# Altium PCB InstallGuide-V2.PcbDoc
Units mm, origin at the board's own origin, x right, y up, seen from the top; angles counter-clockwise.
Board outline 152.4 x 101.6 mm, 2 copper layers (Top Layer, Bottom Layer); 21 components, 11 nets, 77 pads, 78 vias.
Unrouted connection lines stored in the file: 1.
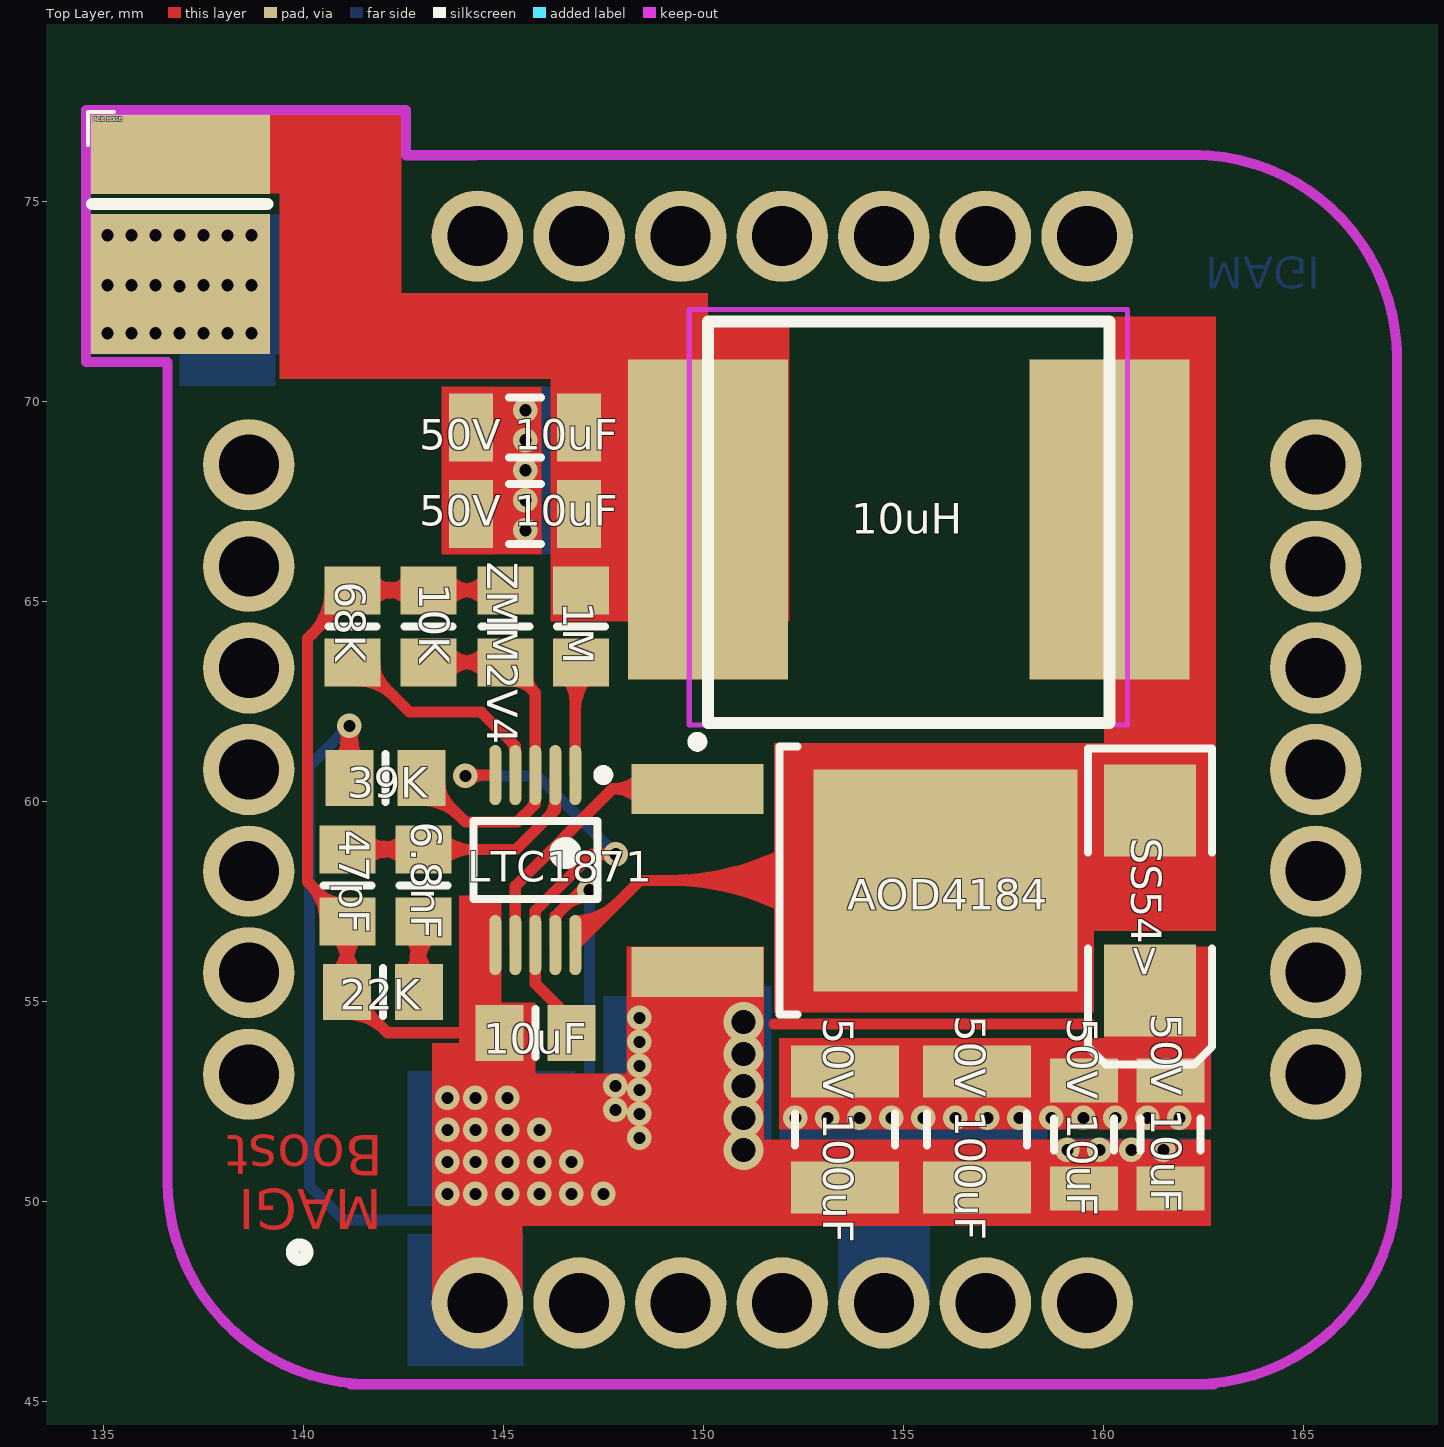
[diagram p0: Top Layer view]
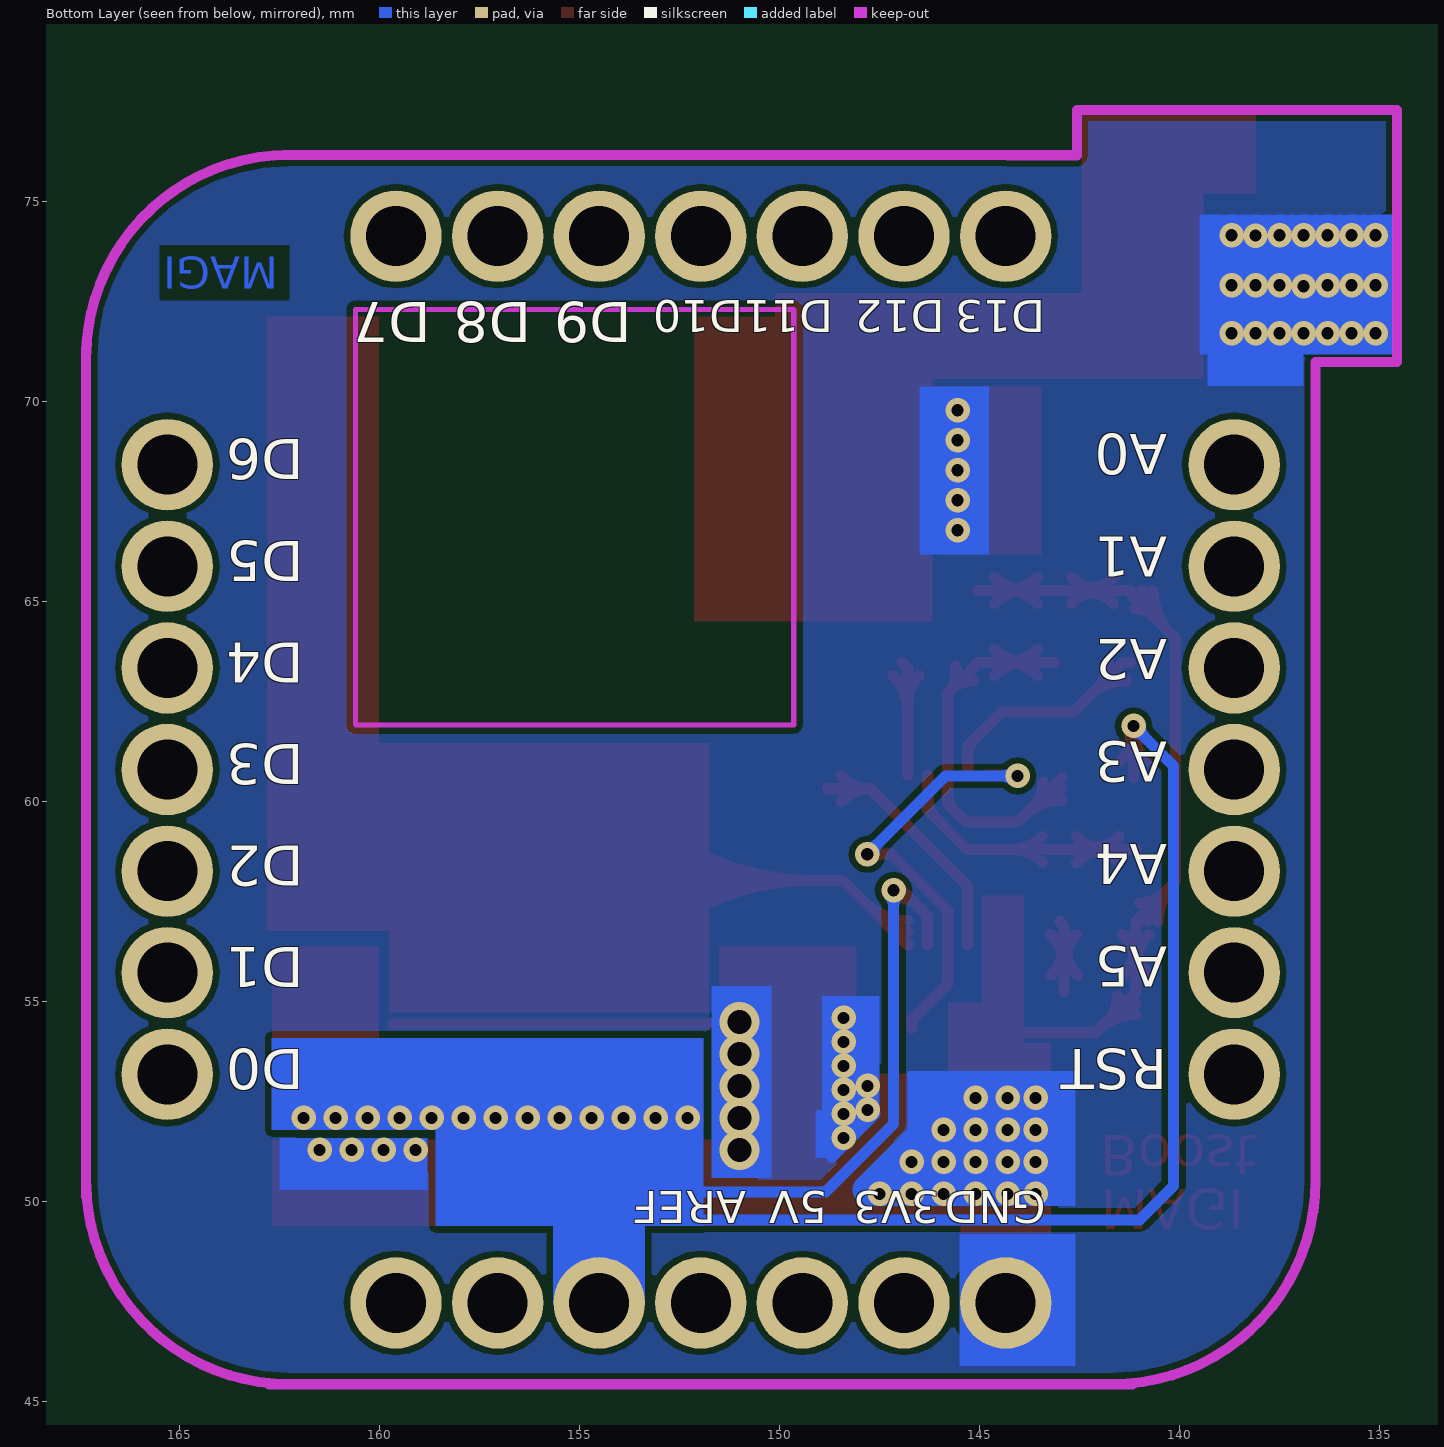
[diagram p1: Bottom Layer view, seen from below]

## Layer stack, top to bottom
Top Solder: solder mask 0.0102, Solder Resist, Dk 3.5
Top Layer: signal copper 0.0356
Dielectric 1: dielectric 0.32, FR-4, Dk 4.8
Bottom Layer: signal copper 0.0356
Bottom Solder: solder mask 0.0102, Solder Resist, Dk 3.5

## Board outline
25.4,25.4 177.8,25.4 177.8,127 25.4,127

## Design rules (kind name [scope] priority, off if disabled: settings)
Clearance [All] p1: gap=0.152
PolygonConnect [All] p1: connectstyle=Relief reliefconductorwidth=0.254 reliefentries=4 polygonreliefangle="90 Angle" airgapwidth=0.254
RoutingVias [All] p1: holewidth=7.112 width=12.7 viastyle="Through Hole" minholewidth=0.305 minwidth=0.61 maxholewidth=0.711 maxwidth=1.27
SolderMaskExpansion [All] p1: expansion=0.102
Width [All] p1: maxlimit=2.54 minlimit=0.152 preferedwidth=0.254
29 further rules are at their usual default settings.

## Components (designator, comment, footprint, x,y, rotation, side; value= is the part's Value field where it differs from the comment)
C1 "CAP_1" C1206 145.542,67.201 r180 top
C2 "CAP_1" C1206 145.542,69.36 r0 top
C3 "CAP_1" C1210_N 156.845,51.816 r90 top
C4 "CAP_1" C1210_N 153.543,51.816 r90 top
C5 "CAP_1" C1206 161.671,51.689 r90 top
C6 "CAP_1" C1206 159.512,51.689 r90 top
C7 "1uf" 6-0805_N 141.097,57.912 r90 top
C8 "CAP_1" 6-0805_n 145.796,54.229 r0 top
C9 "1uf" 6-0805_N 141.986,55.245 r0 top
D1 "DIODE_1" SMB 161.163,57.531 r270 top
D2 "LED_0805" 6-0805_n 145.05,64.389 r270 top
J1 "MAGIsBoard" MAGIsBoard 151.97,60.81 r180 top
J2 "CON2" T-Mini 136.92,74.57 r0 top
L1 "INDUCTOR" 10*10 155.067,67.056 r180 top
R1 "0805" 6-0805_N 146.939,64.389 r270 top
R2 "0805" 6-0805_N 143.002,57.912 r90 top
R3 "0805" 6-0805_N 143.129,64.389 r90 top
R4 "0805" 6-0805_N 141.224,64.389 r90 top
R5 "0805" 6-0805_N 142.05,60.6 r180 top
U1 "LTC1871" LTC1871 145.796,58.547 r270 top
U10 "NMOS" AOD4184 153.797,58.039 r0 top

## Footprints (in the part's own frame and the unit in brackets; to place one, negate y for a bottom-side part, rotate by r counter-clockwise, add the part's x,y. Pads: shape width x height; smd on the part's side, far side on the other; paste and mask are expansions set on the pad)
6-0805_N [mm] "Chip Resistor, Body 2.0x1.2mm, IPC Medium Density"
  rect 1.2x1.4 smd: 1(-0.9,0) 2(0.9,0)
  silkscreen extent 0,-0.6 0,0.6, body extent -1.07,-0.7 1.07,0.7, height 0.7
6-0805_n [mm] "Chip Resistor, Body 2.0x1.2mm, IPC Medium Density"
  rect 1.2x1.4 smd: 1(-0.9,0) 2(0.9,0)
  silkscreen extent 0,-0.6 0,0.6, body extent -1.07,-0.7 1.07,0.7, height 0.7
10*10 [mm]
  rect 4x8 smd: 1(-5.08,0) 2(4.953,0)
  silkscreen extent -5.08,-4.95 4.95,5.08
AOD4184 [mm] "D-PAK, 3-Pads, Body 6.21x6.73mm (max), IPC Medium Density"
  rect 3.3x1.25 smd: 1(-3.95,2.29) 3(-3.95,-2.29)
  rect 6.6x5.55 smd: 4(2.25,0)
  silkscreen extent -4.07,-3.35 -1.45,3.59, body extent -2.3,-3.37 3.92,3.37, height 2.39
C1206 [mm] "Chip Capacitor, Body 3.2x1.6mm, IPC High Density"
  rect 1.1x1.7 smd: 1(-1.35,0) 2(1.35,0)
  silkscreen extent -0.4,-0.75 0.4,0.75, body extent -1.7,-0.9 1.7,0.9, height 1.3
C1210_N [mm] "Chip Capacitor, Body 3.2x2.5mm, IPC Medium Density"
  rect 1.3x2.7 smd: 1(-1.45,0) 2(1.45,0)
  silkscreen extent -0.4,-1.25 0.4,1.25, body extent -1.7,-1.35 1.7,1.35, height 1.5
LTC1871 [mm]
  oval 1.5x0.3 smd: 1(-2.125,1) 2(-2.125,0.5) 3(-2.125,0) 4(-2.125,-0.5) 5(-2.125,-1) 6(2.125,-1) 7(2.125,-0.5) 8(2.125,0) 9(2.125,0.5) 10(2.125,1)
  silkscreen extent -2.25,-1.55 0.97,1.83, body extent -1.55,-1.55 1.55,1.55, height 1.1
MAGIsBoard [mil]
  round 90 hole 59.06: 1(300,525) 2(200,525) 3(100,525) 4(0,525) 5(-100,525) 6(-200,525) 7(-300,525) 8(-525,300) 9(-525,200) 10(-525,100) 11(-525,0) 12(-525,-100) 13(-525,-200) 14(-525,-300) 15(-300,-525) 16(-200,-525) 17(-100,-525) 18(0,-525) 19(100,-525) 20(200,-525) 21(300,-525) 22(525,-300) 23(525,-200) 24(525,-100) 25(525,0) 26(525,100) 27(525,200) 28(525,300)
  Keep-Out Layer lines w10: 605,405 ccw(c405,405) 405,605 ; 425,605 -425,605 ; 370.2,-605 -410,-605 ; -405,605 ccw(c-405,405) -605,405 ; -405,-605 cw(c-405,-405) -605,-405 ; -605,420 -605,290 -605,-415
  silkscreen extent 468,468 482,482
SMB [mm] "DO-214-AA/SMB; 2 C-Bend Leads; Body 5.3 x 3.6 mm, inc. leads (LxW)"
  rect 2.3x2.3 smd: 1(-2.25,0) 2(2.25,0)
  silkscreen extent -3.8,-1.55 4.1,1.55
T-Mini [mm]
  rect 4.5x2 smd: 1(0,1.625)
  rect 4.5x3.5 smd: 2(0,-1.625)
  silkscreen extent -2.3,0.38 2.18,2.68

## Part data
C1 C2 C3 C4 C5 C6 C8: "Capacitor"
C7 C9: library part CAP_1, "Capacitor"
D1: "Diode"
D2: "LED"
J2: "Connector"
R1 R2 R3 R4 R5: library part RES1_1
U10: "TO252"

## Via types
v1: diameter 0.61, hole 0.305, Top Layer to Bottom Layer, 73 vias
v2: diameter 1, hole 0.6, Top Layer to Bottom Layer, 5 vias

## Nets (pads, with @x,y where several pads share a name; then routed paths per layer and width w, separated by ;. In a path a pad name is that pad's centre, name@x,y a point inside that pad or via, vN(x,y) a via of type N, cw(c..) or ccw(c..) an arc to the next point about the centre after c; other vN are vias at no path point)
GND: C1.2 C2.1 C3.1 C4.1 C5.1 C6.1 C7.1 C8.1 C9.1 D2.1 J1.1 J2.2 R3.2 R4.2 U1.6 U10.3 | length 56.2
  Top Layer w0.279: 140.141,57.968 cw(c139.184,57.012) C7.1@140.537,57.012 ; 140.206,64.184 ccw(c139.101,65.289) R4.2@140.664,65.289 ; 140.382,57.727 ccw(c140.997,58.342) C7.1@140.997,57.472 ; C7.1@140.617,57.492 cw(c140.138,57.012) C7.1@140.816,57.012 ; 140.657,64.635 cw(c141.124,64.169) R4.2@141.124,64.829 ; 140.683,64.661 ccw(c140.055,65.289) R4.2@140.943,65.289 ; C9.1@140.761,55.67 ccw(c139.975,56.456) 141.086,56.456 ccw(c142.197,56.456) C9.1@141.411,55.67 ; C7.1@140.772,56.687 cw(c140.012,55.927) C9.1@141.086,55.927 ; C7.1@140.877,56.568 cw(c140.817,56.345) 141.04,56.285 ; C7.1@141.075,56.415 cw(c141.39,56.33) C7.1@141.227,56.613 ; C9.1@141.086,54.685 cw(c141.086,53.332) 142.042,54.289 ; C9.1@141.086,54.964 cw(c141.086,54.286) C9.1@141.566,54.765 ; C9.1@141.086,55.874 cw(c142.235,55.874) C7.1@141.422,56.687 ; C9.1@141.546,55.145 ccw(c142.416,55.145) 141.801,54.53 ; R4.2@141.649,64.964 cw(c142.435,64.178) 142.435,65.289 cw(c142.435,66.4) R4.2@141.649,65.614 ; 142.137,65.209 cw(c142.261,64.744) R3.2@142.654,65.023 ; 142.137,65.369 ccw(c142.261,65.834) R3.2@142.654,65.555 ; 142.274,65.246 ccw(c142.122,65.812) R3.2@142.63,65.519 ; 142.274,65.332 cw(c142.122,64.766) R3.2@142.63,65.059 ; R3.2@142.704,64.964 ccw(c141.918,64.178) 141.918,65.289 ccw(c141.918,66.4) R3.2@142.704,65.614 ; R3.2@143.554,64.964 cw(c144.34,64.178) 144.34,65.289 cw(c144.34,66.4) R3.2@143.554,65.614 ; C8.1@144.571,53.904 ccw(c143.785,53.118) 143.785,54.229 ccw(c143.785,55.34) C8.1@144.571,54.554 ; D2.1@144.625,64.964 ccw(c143.839,64.178) 143.839,65.289 ccw(c143.839,66.4) D2.1@144.625,65.614 ; C8.1 142.102,54.229 C9.1 141.086,57.001 C7.1 140.105,58.004 140.105,64.083 141.224,65.202 R4.2 R3.2 D2.1 ; U10.3 U10.3@150.34,55.749 ; 151.765,54.445 159.67,54.445
  Bottom Layer w0.254: v1@147.6,52.2 148.7,51.1 cw(c149.042,51.442) v1@148.573,51.557 ; v1@147.724,52.3 ccw(c148.264,52.3) 147.882,51.918 ; v1@147.724,52.303 ccw(c148.115,52.289) 147.919,51.95 ; v1@147.755,52.045 ccw(c148.4,52.69) v1@148.4,51.778 ; v1@147.978,52.294 ccw(c148.594,52.273) v1@148.286,51.739 ; v1@147.978,52.3 ccw(c149.131,52.3) v1@148.316,51.484
  Bottom Layer w0.762: 146.573,51.527 147.8,50.3
  other v1: 143.6,50.2 144.3,50.2 145.1,50.2 145.9,50.2 146.7,50.2 147.5,50.2 143.6,51 144.3,51 145.1,51 145.9,51 146.7,51 159.1,51.3 159.9,51.3 160.7,51.3 161.5,51.3 148.4,51.6 143.6,51.8 144.3,51.8 145.1,51.8 145.9,51.8 148.4,52.2 147.8,52.3 143.6,52.6 144.3,52.6 145.1,52.6 148.4,52.8 147.8,52.9 148.4,53.4 148.4,54 148.4,54.6 145.55,66.79 145.55,67.54 145.55,68.29 145.55,69.04 145.55,69.79 135.1,71.715 135.7,71.715 136.3,71.715 136.9,71.715 137.5,71.715 138.1,71.715 138.7,71.715 136.9,72.89 135.1,72.915 135.7,72.915 136.3,72.915 137.5,72.915 138.1,72.915 138.7,72.915 135.1,74.165 135.7,74.165 136.3,74.165 136.9,74.165 137.5,74.165 138.102,74.159 138.7,74.165
  other v2: 151,51.3 151,52.1 151,52.9 151,53.7 151,54.5
NetC7_2: C7.2 R2.2 U1.2 | length 14.4
  Top Layer w0.279: C7.2 R2.2 145.312,58.812 146.296,59.796 U1.2 ; C7.2@141.522,58.487 cw(c142.308,57.701) 142.308,58.812 cw(c142.308,59.923) C7.2@141.522,59.137 ; 142.01,58.732 cw(c142.134,58.267) R2.2@142.527,58.546 ; 142.01,58.892 ccw(c142.134,59.357) R2.2@142.527,59.078 ; 142.147,58.769 ccw(c141.995,59.335) R2.2@142.503,59.042 ; 142.147,58.855 cw(c141.995,58.289) R2.2@142.503,58.582 ; R2.2@142.577,58.487 ccw(c141.791,57.701) 141.791,58.812 ccw(c141.791,59.923) R2.2@142.577,59.137 ; R2.2@143.427,58.487 cw(c144.213,57.701) 144.213,58.812 cw(c144.213,59.923) R2.2@143.427,59.137 ; 146.083,59.583 ccw(c145.595,60.072) U1.2@146.286,60.072
NetC8_2: C8.2 U1.5 U1.8 | length 13.7
  Top Layer w0.279: v1(144.05,60.65) 144.072,60.672 U1.5 ; v1@144.167,60.533 cw(c144.502,60.198) 144.502,60.672 ; v1@144.167,60.767 ccw(c144.395,60.995) 144.395,60.672 ; C8.2@146.696,54.346 146.696,54.554 145.796,55.454 U1.8 145.796,57.28 147.206,58.69 v1(147.81,58.69) ; v1@147.693,58.573 ccw(c147.411,58.291) 147.411,58.69 ccw(c147.411,59.089) v1@147.693,58.807
  Bottom Layer w0.279: v1(144.05,60.65) 145.85,60.65 v1(147.81,58.69) ; v1@144.167,60.533 cw(c144.449,60.251) 144.449,60.65 cw(c144.449,61.049) v1@144.167,60.767 ; v1@147.645,58.69 ccw(c147.246,58.69) 147.528,58.972 ccw(c147.81,59.254) v1@147.81,58.855
NetC9_2: C9.2 R2.1 | length 6.4
  Top Layer w0.279: C9.2@142.561,55.67 ccw(c141.775,56.456) 142.886,56.456 ccw(c143.997,56.456) C9.2@143.211,55.67 ; R2.1@142.577,56.687 cw(c141.829,55.939) C9.2@142.886,55.939 ; R2.1@142.617,56.651 cw(c142.3,56.248) 142.795,56.115 ; 142.819,56.205 cw(c143.469,56.031) R2.1@143.132,56.613 ; C9.2 142.886,56.896 R2.1 ; C9.2@142.886,55.862 cw(c144.052,55.862) R2.1@143.227,56.687
NetD1_1: D1.1 L1.1 U1.10 U10.4 | length 55.9
  Top Layer w0.279: U1.10 148.413,58.039 U10.4 ; U1.10@146.796,56.473 ccw(c146.796,56.598) U1.10@146.884,56.51 ; U1.10@146.796,56.753 ccw(c146.796,57.552) 147.361,56.987 ; U1.10@146.796,57.032 ccw(c146.796,58.506) 147.838,57.464 ; U10.4@153.659,56.176 ccw(c149.16,51.677) 149.16,58.039 ccw(c149.16,64.401) U10.4@153.659,59.902 ; U10.4@153.856,56.373 ccw(c149.834,52.351) 149.834,58.039 ccw(c149.834,63.727) U10.4@153.856,59.705 ; U10.4@154.054,56.571 ccw(c150.509,53.026) 150.509,58.039 ccw(c150.509,63.052) U10.4@154.054,59.507 ; U10.4@154.251,56.768 ccw(c151.183,53.7) 151.183,58.039 ccw(c151.183,62.378) U10.4@154.251,59.31 ; U10.4@154.449,56.966 ccw(c151.858,54.375) 151.858,58.039 ccw(c151.858,61.703) U10.4@154.449,59.112 ; U10.4@154.646,57.163 ccw(c152.532,55.049) 152.532,58.039 ccw(c152.532,61.029) U10.4@154.646,58.915
NetD2_2: D2.2 R3.1 R5.1 U1.3 | length 16.5
  Top Layer w0.279: R5.1@142.95,60.04 cw(c142.95,58.687) 143.906,59.644 ; R5.1@142.95,60.319 cw(c142.95,59.641) R5.1@143.43,60.12 ; R5.1 144.055,59.495 145.345,59.495 145.796,59.947 U1.3@145.796,60.556 ; R3.1 145.034,63.489 145.796,62.727 ; R5.1@143.41,60.5 ccw(c144.28,60.5) 143.665,59.885 ; R3.1@143.554,63.164 cw(c144.34,62.378) 144.34,63.489 cw(c144.34,64.6) R3.1@143.554,63.814 ; D2.2@144.625,63.164 ccw(c143.839,62.378) 143.839,63.489 ccw(c143.839,64.6) D2.2@144.625,63.814 ; D2.2@145.15,63.029 cw(c145.15,62.198) 145.738,62.785 ; D2.2@145.6,63.392 ccw(c146.308,63.239) 145.796,62.727 ; 145.69,59.841 ccw(c145.459,60.072) U1.3@145.786,60.072 ; U1.3 145.796,62.727
NetR1_2: R1.2 U1.1 | length 4.6
  Top Layer w0.279: R1.2@146.514,63.164 cw(c145.832,62.482) 146.796,62.482 ; U1.1 146.796,63.346 R1.2 ; 146.796,62.274 cw(c148.054,62.274) R1.2@147.164,63.164
NetR4_1: R4.1 U1.4 | length 7.7
  Top Layer w0.279: R4.1 141.416,63.489 142.655,62.25 144.443,62.25 145.296,61.397 U1.4 ; R4.1@141.324,63.029 cw(c141.324,61.696) 142.267,62.638 ; R4.1@141.784,63.489 ccw(c142.674,63.489) 142.045,62.86 ; 145.19,61.503 cw(c144.959,61.272) U1.4@145.286,61.272
NetU1_7: U1.7 U10.1 | length 7.6
  Top Layer w0.279: U1.7 145.296,57.896 147.729,60.329 ; U10.1@148.462,60.004 ccw(c147.729,59.341) 147.729,60.329 ; U10.1@148.462,60.654 cw(c147.729,61.317) 147.729,60.329 ; U10.1@148.8,60.329 147.729,60.329
VIN: C1.1 C2.2 J2.1 L1.2 R1.1
VOUT: C3.2 C4.2 C5.2 C6.2 D1.2 J1.5 R5.2 U1.9 | length 46.3
  Top Layer w0.279: R5.2@140.825,61.025 ccw(c140.039,61.811) 141.15,61.811 ccw(c142.261,61.811) R5.2@141.475,61.025 ; v1@141.007,61.817 cw(c140.594,61.579) 141.055,61.455 ; v1@141.033,61.783 cw(c140.751,61.501) 141.15,61.501 cw(c141.549,61.501) v1@141.267,61.783 ; v1@141.067,61.757 cw(c140.907,61.48) 141.217,61.563 ; 141.083,61.563 cw(c141.393,61.48) v1@141.233,61.757 ; R5.2 v1(141.15,61.9) ; 141.245,61.455 cw(c141.706,61.579) v1@141.293,61.817 ; U1.9 146.296,57.147 v1@147.109,57.96 ; U1.9@146.306,57.022 cw(c146.633,57.022) 146.402,57.253 ; 146.508,57.359 cw(c147.15,56.716) v1@147.15,57.625
  Bottom Layer w0.279: v1@140.985,61.9 cw(c140.586,61.9) 140.868,61.618 cw(c141.15,61.336) v1@141.15,61.735 ; v1(141.15,61.9) 140.15,60.9 140.15,50.4 141,49.55 153.65,49.55 ; v1@147.033,57.673 cw(c146.751,57.391) 147.15,57.391 cw(c147.549,57.391) v1@147.267,57.673 ; v1(147.15,57.79) 147.15,51.95 148.85,50.25 152.15,50.25
  other v1: 152.3,52.1 153.1,52.1 153.9,52.1 154.7,52.1 155.5,52.1 156.3,52.1 157.1,52.1 157.9,52.1 158.7,52.1 159.5,52.1 160.3,52.1 161.1,52.1 161.9,52.1
pads on no net: J1.2 J1.3 J1.4 J1.6 J1.7 J1.8 J1.9 J1.10 J1.11 J1.12 J1.13 J1.14 J1.15 J1.16 J1.17 J1.18 J1.19 J1.20 J1.21 J1.22 J1.23 J1.24 J1.25 J1.26 J1.27 J1.28

## Polygon pours and split planes (outlines as drawn)
GND on Bottom Layer "Bottom Layer-No Net" (solid, remove dead copper, pour order 2): 134.567,77.301 142.567,77.301 142.567,76.177 142.59,76.2 167.4,76.2 167.6,76.2 167.6,45.3 136.4,45.3 136.3,45.3 136.3,70.8 136.3,71.001 134.567,71.001

## Keep-outs
Keep-Out Layer:
  lines w0.127: 149.646,61.924 160.606,61.924 160.606,72.314 149.646,72.314 149.646,61.924
  lines w0.254: 136.55,71.001 134.567,71.001 134.567,77.301 142.567,77.301 142.567,76.168 144.297,76.168 ; 136.6,70.99 136.6,50.523 136.603,50.523

## Other copper
Top Layer:
  rectangle net GND: 143.22,47.44 145.48,53.97
  rectangle net VIN: 139.45,70.57 150.12,72.72
  rectangle net VIN: 139.4,70.57 142.45,77.2
  rectangle net VIN: 138.09,75.21 142.45,77.19
  rectangle net VIN: 146.177,64.516 152.146,72.136
  rectangle net NetD1_1: 160.02,56.769 162.814,72.136
  rectangle net NetD1_1: 151.765,56.769 162.814,61.468
  rectangle net NetD1_1: 151.765,54.737 159.766,56.769
  rectangle net VOUT: 160.02,51.816 162.687,56.388
  rectangle net VOUT: 151.892,51.816 162.687,54.102
  rectangle net GND: 151.892,49.403 162.687,51.562
  rectangle net GND: 148.082,49.403 151.511,56.388
  rectangle net GND: 148.082,49.403 152.4,51.562
  rectangle net GND: 144.272,49.403 145.796,54.991
  rectangle net GND: 144.272,49.403 151.511,53.213
  rectangle net GND: 143.891,53.975 144.95,57.658
  rectangle net GND: 143.891,49.403 145.796,54.95
  rectangle net GND: 143.45,66.19 145.95,70.39
  text "Boost" at 141.992,51.667 h1.02 r180
  text "MAGI" at 141.972,50.317 h1 r180
Bottom Layer:
  rectangle net GND: 142.6,45.9 145.5,49.2
  rectangle net GND: 148.6,51.1 149.1,51.3
  rectangle net GND: 136.9,70.4 139.3,71.715
  rectangle net GND: 158.8,50.3 162.5,51.6
  rectangle net GND: 150.2,50.6 151.7,55.4
  rectangle net GND: 148.4,51.3 149.1,51.6
  rectangle net GND: 148.1,51.5 149.1,51.9
  rectangle net GND: 147.8,51.8 149.1,52.3
  rectangle net GND: 147.5,52.1 148.944,55.144
  rectangle net GND: 146.3,49.9 147.9,50.6
  rectangle net GND: 146.3,50.6 147.1,51.4
  rectangle net GND: 142.6,49.9 146.8,53.279
  rectangle net VOUT: 153.37,47.44 155.66,50.18
  rectangle net GND: 144.77,66.18 146.5,70.38
  rectangle net GND: 134.68,71.19 139.5,74.69
  rectangle net VOUT: 151.9,49.4 158.6,54.1
  rectangle net VOUT: 151.9,51.8 162.7,54.1

## Silkscreen, mask and mechanical layers (free items; w line width, h text height)
Top Overlay:
  text "50V 10uF" at 142.9,68.8 h0.76
  text "50V 10uF" at 142.9,66.9 h0.76
  text "10uH" at 153.7,66.7 h0.76
  text "ZMM2V4" at 144.6,66 h0.76 r270
  text "68K" at 140.8,65.5 h0.76 r270
  text "10K" at 142.9,65.464 h0.76 r270
  text "1M" at 146.5,65 h0.76 r270
  text "39K" at 141.1,60.1 h0.76
  text "6.8nF" at 142.7,59.5 h0.76 r270
  text "47pF" at 140.9,59.3 h0.76 r270
  text "SS54>" at 160.7,59.1 h0.76 r270
  text "LTC1871" at 144.1,58 h0.76
  text "AOD4184" at 153.6,57.3 h0.76
  text "22K" at 140.911,54.8 h0.76
  text "50V 10uF" at 161.2,54.7 h0.76 r270
  text "50V 100uF" at 156.3,54.664 h0.76 r270
  text "50V 100uF" at 153,54.6 h0.76 r270
  text "50V 10uF" at 159.1,54.6 h0.76 r270
  text "10uF" at 144.5,53.7 h0.76
Top Solder:
  lines w1.27: 149.6,54.3 149.6,50.1 151.3,50.1

## Text inside footprints (layer, text, board x,y; h text height)
J1: Bottom Overlay "AREF" at 150.838,50.273 h0.8 r180; Bottom Overlay "5V" at 148.806,50.273 h0.8 r180; Bottom Overlay "3V3" at 146.012,50.273 h0.8 r180; Bottom Overlay "GND" at 143.345,50.273 h0.8 r180; Bottom Overlay "RST" at 140.312,53.823 h1 r180; Bottom Overlay "A5" at 140.312,56.384 h1 r180; Bottom Overlay "A4" at 140.312,58.945 h1 r180; Bottom Overlay "A3" at 140.312,61.507 h1 r180; Bottom Overlay "A2" at 140.312,64.068 h1 r180; Bottom Overlay "A1" at 140.312,66.629 h1 r180; Bottom Overlay "A0" at 140.312,69.19 h1 r180; Bottom Overlay "D13" at 143.36,72.546 h0.8 r180; Bottom Overlay "D12" at 145.875,72.546 h0.8 r180; Bottom Overlay "D11" at 148.656,72.546 h0.8 r180; Bottom Overlay "D10" at 150.904,72.546 h0.8 r180; Bottom Overlay "D9" at 153.698,72.492 h1 r180; Bottom Overlay "D8" at 156.212,72.492 h1 r180; Bottom Overlay "D7" at 158.727,72.492 h1 r180; Bottom Overlay "D6" at 161.902,69.063 h1 r180; Bottom Overlay "D5" at 161.902,66.523 h1 r180; Bottom Overlay "D4" at 161.902,63.983 h1 r180; Bottom Overlay "D3" at 161.902,61.443 h1 r180; Bottom Overlay "D2" at 161.902,58.903 h1 r180; Bottom Overlay "D1" at 161.902,56.363 h1 r180; Bottom Overlay "D0" at 161.902,53.823 h1 r180; Bottom Layer "MAGI" at 162.54,73.63 h0.8 r180
J2: Top Overlay "PCB EDGE" at 134.74,77.015 h0.1